# Altium PCB PCB_v5.PcbDoc (part 1 of 2)
Units mm, origin at the board's own origin, x right, y up, seen from the top; angles counter-clockwise.
Board outline 150 x 320 mm, 4 copper layers (Top Layer, Vcc, Gnd, Bottom Layer), stack 0.778 mm thick; 181 components, 87 nets, 559 pads, 205 vias.
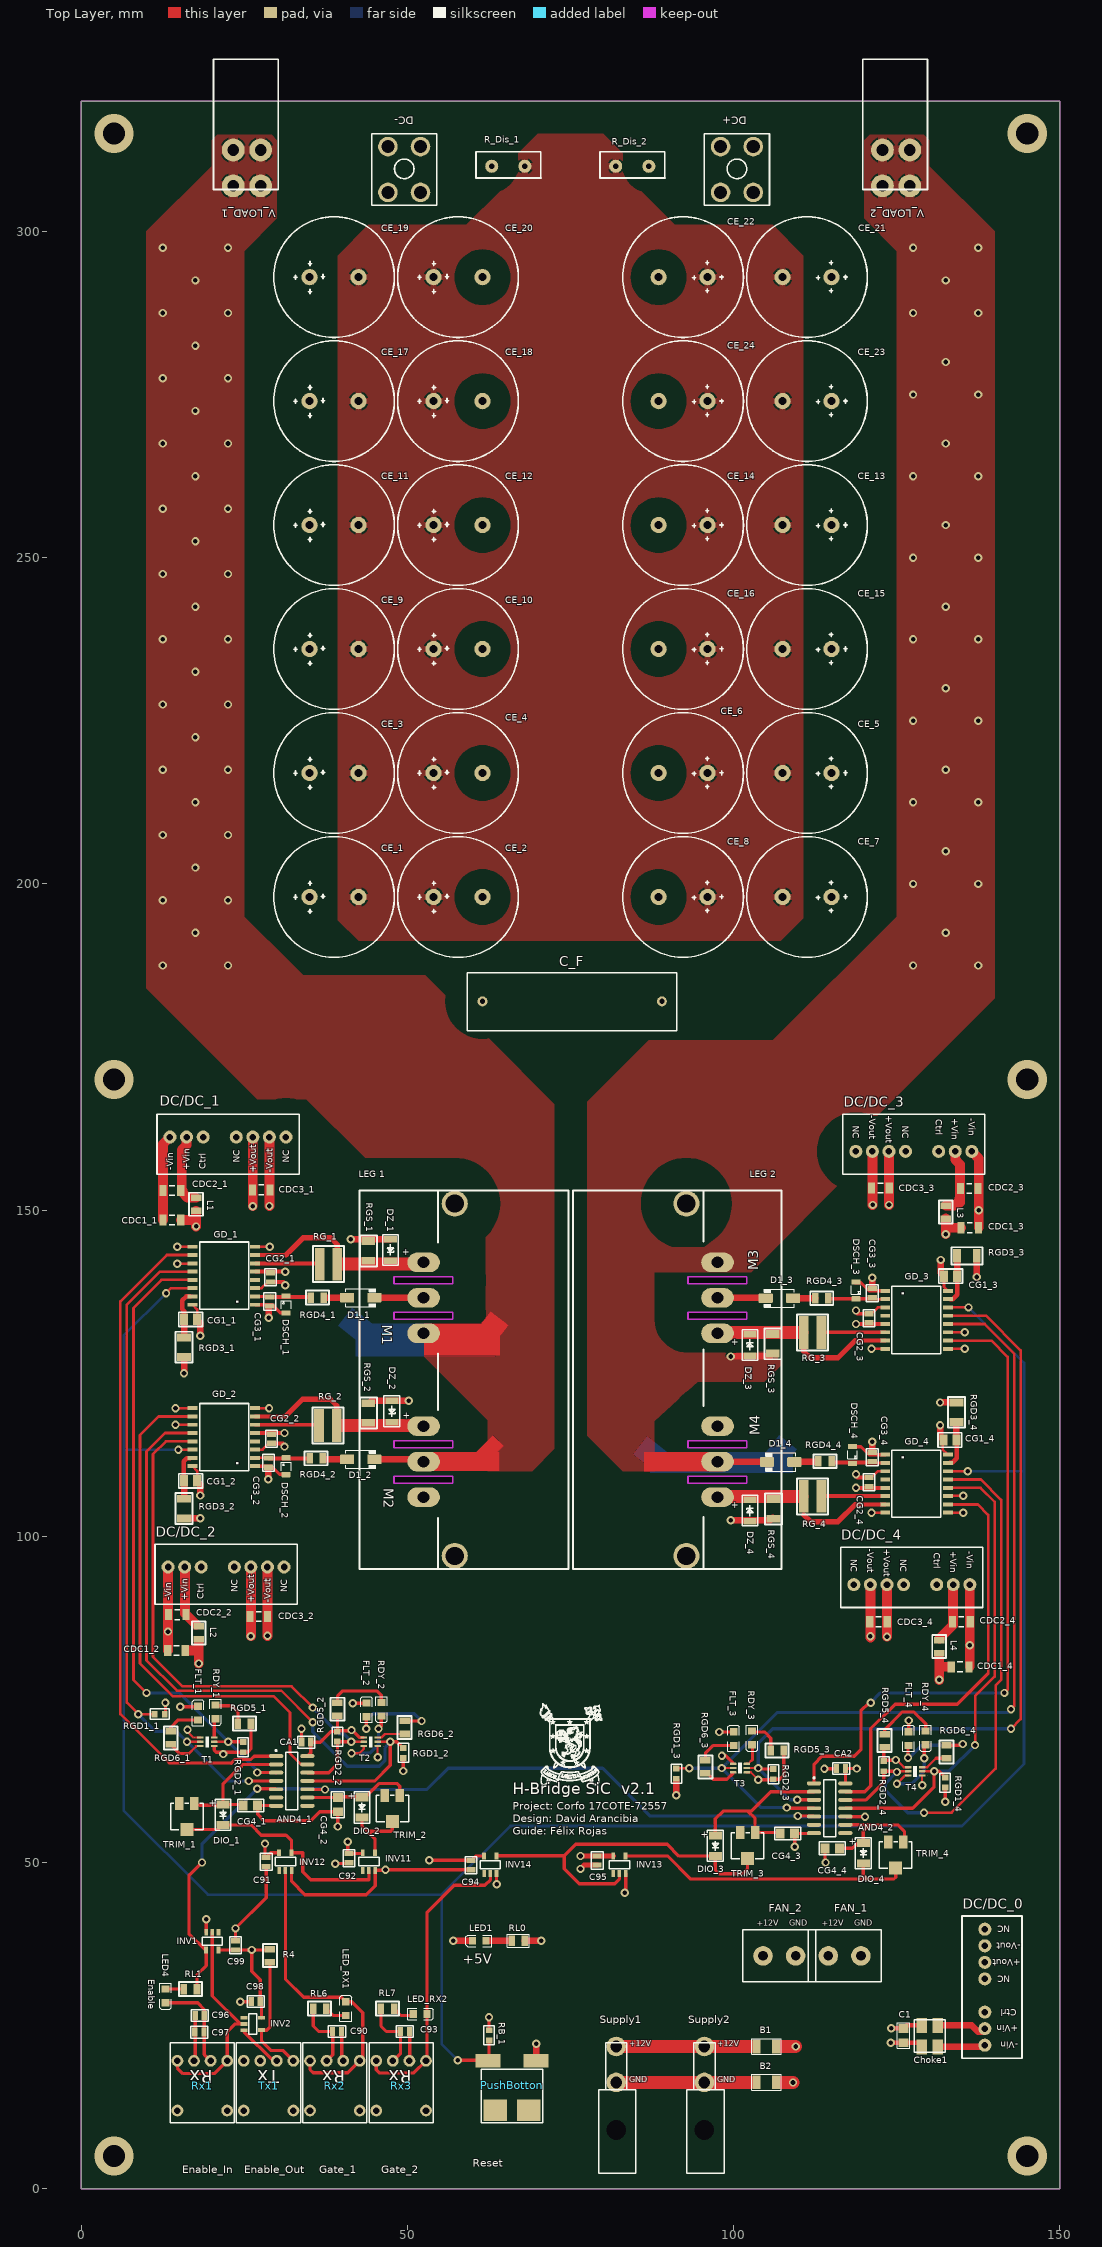
[diagram p0: Top Layer view]
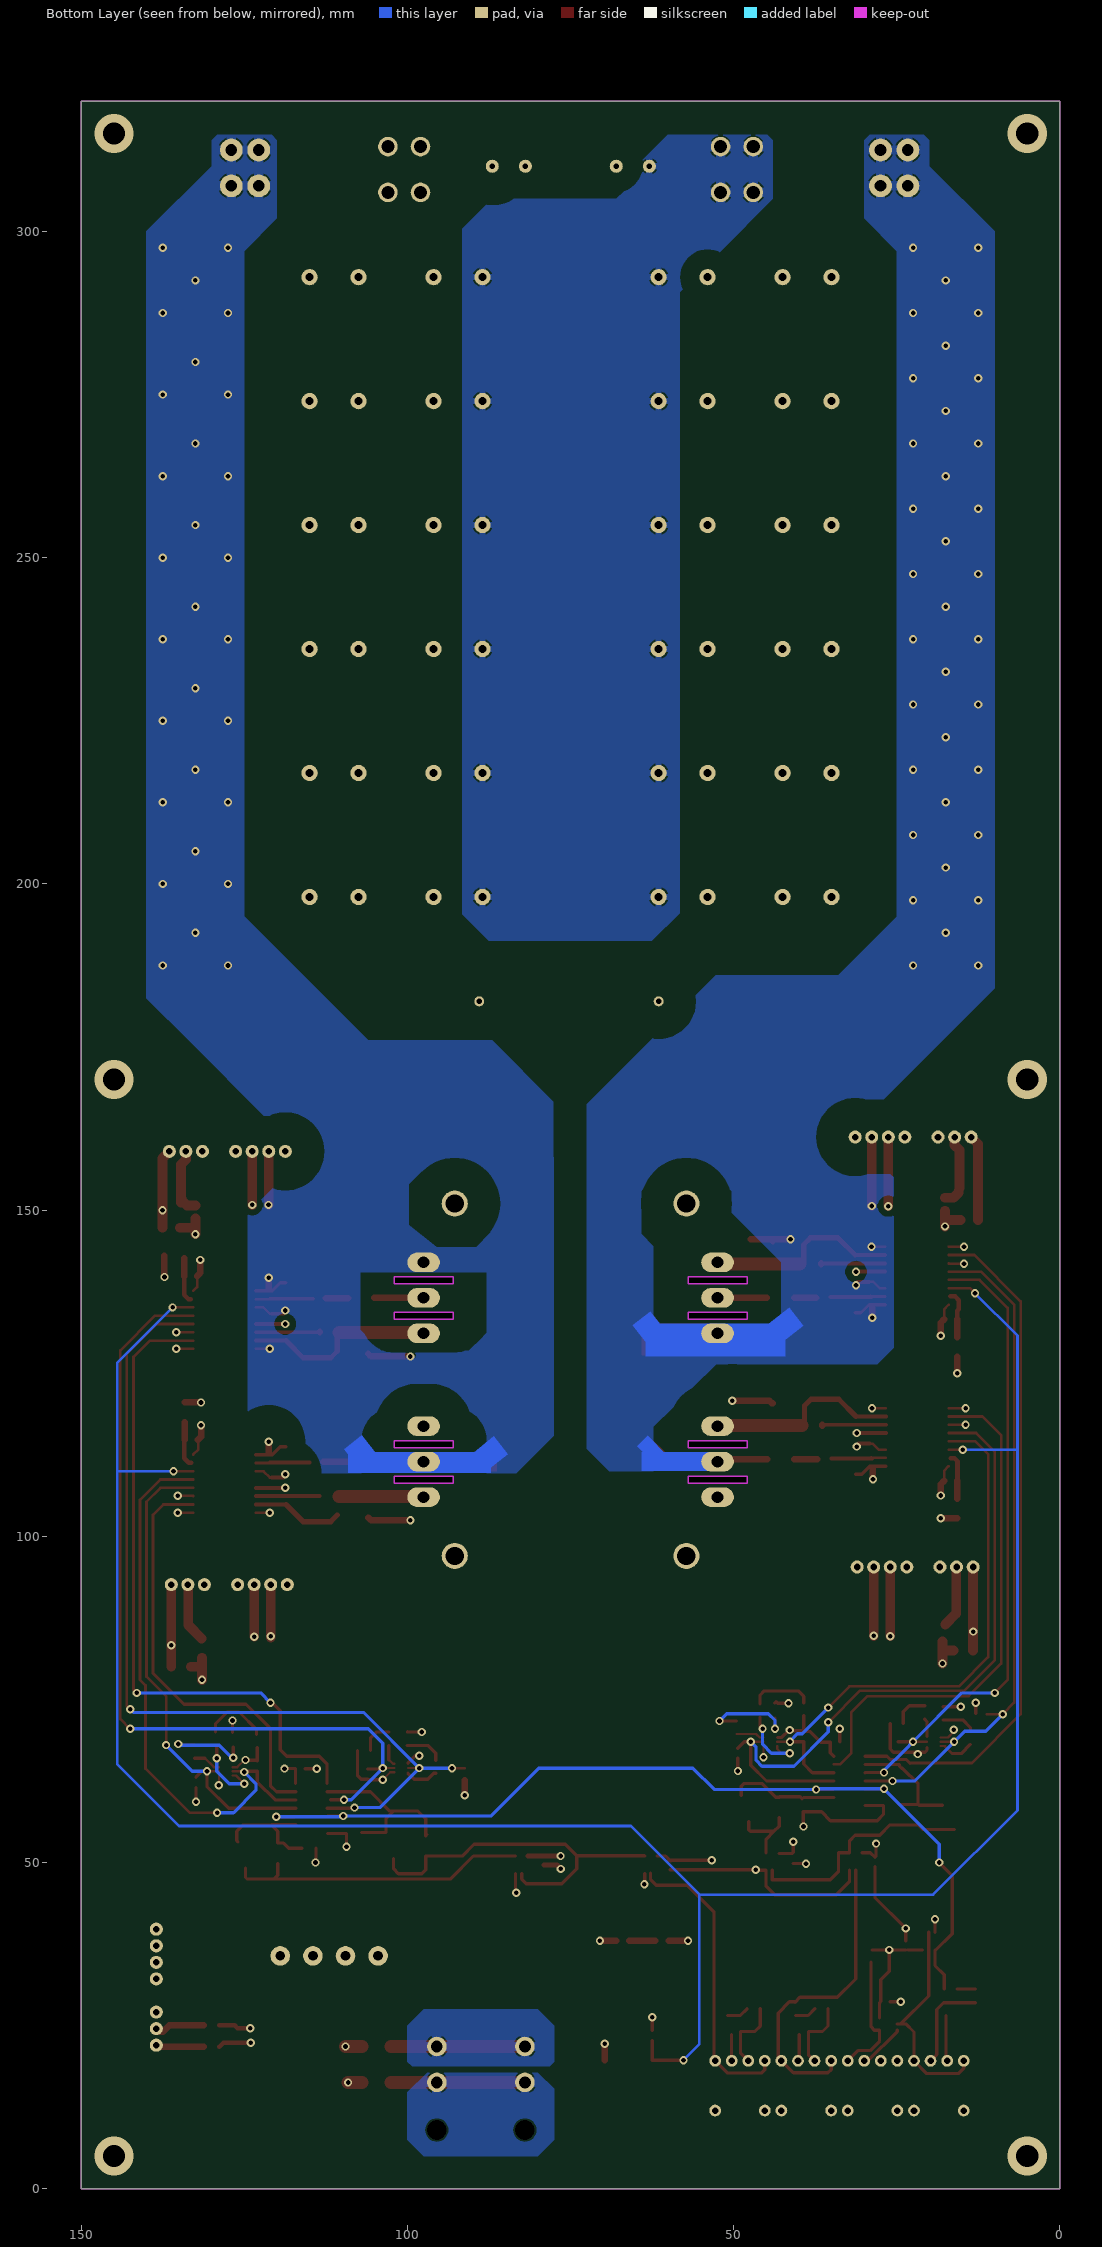
[diagram p1: Bottom Layer view, seen from below]
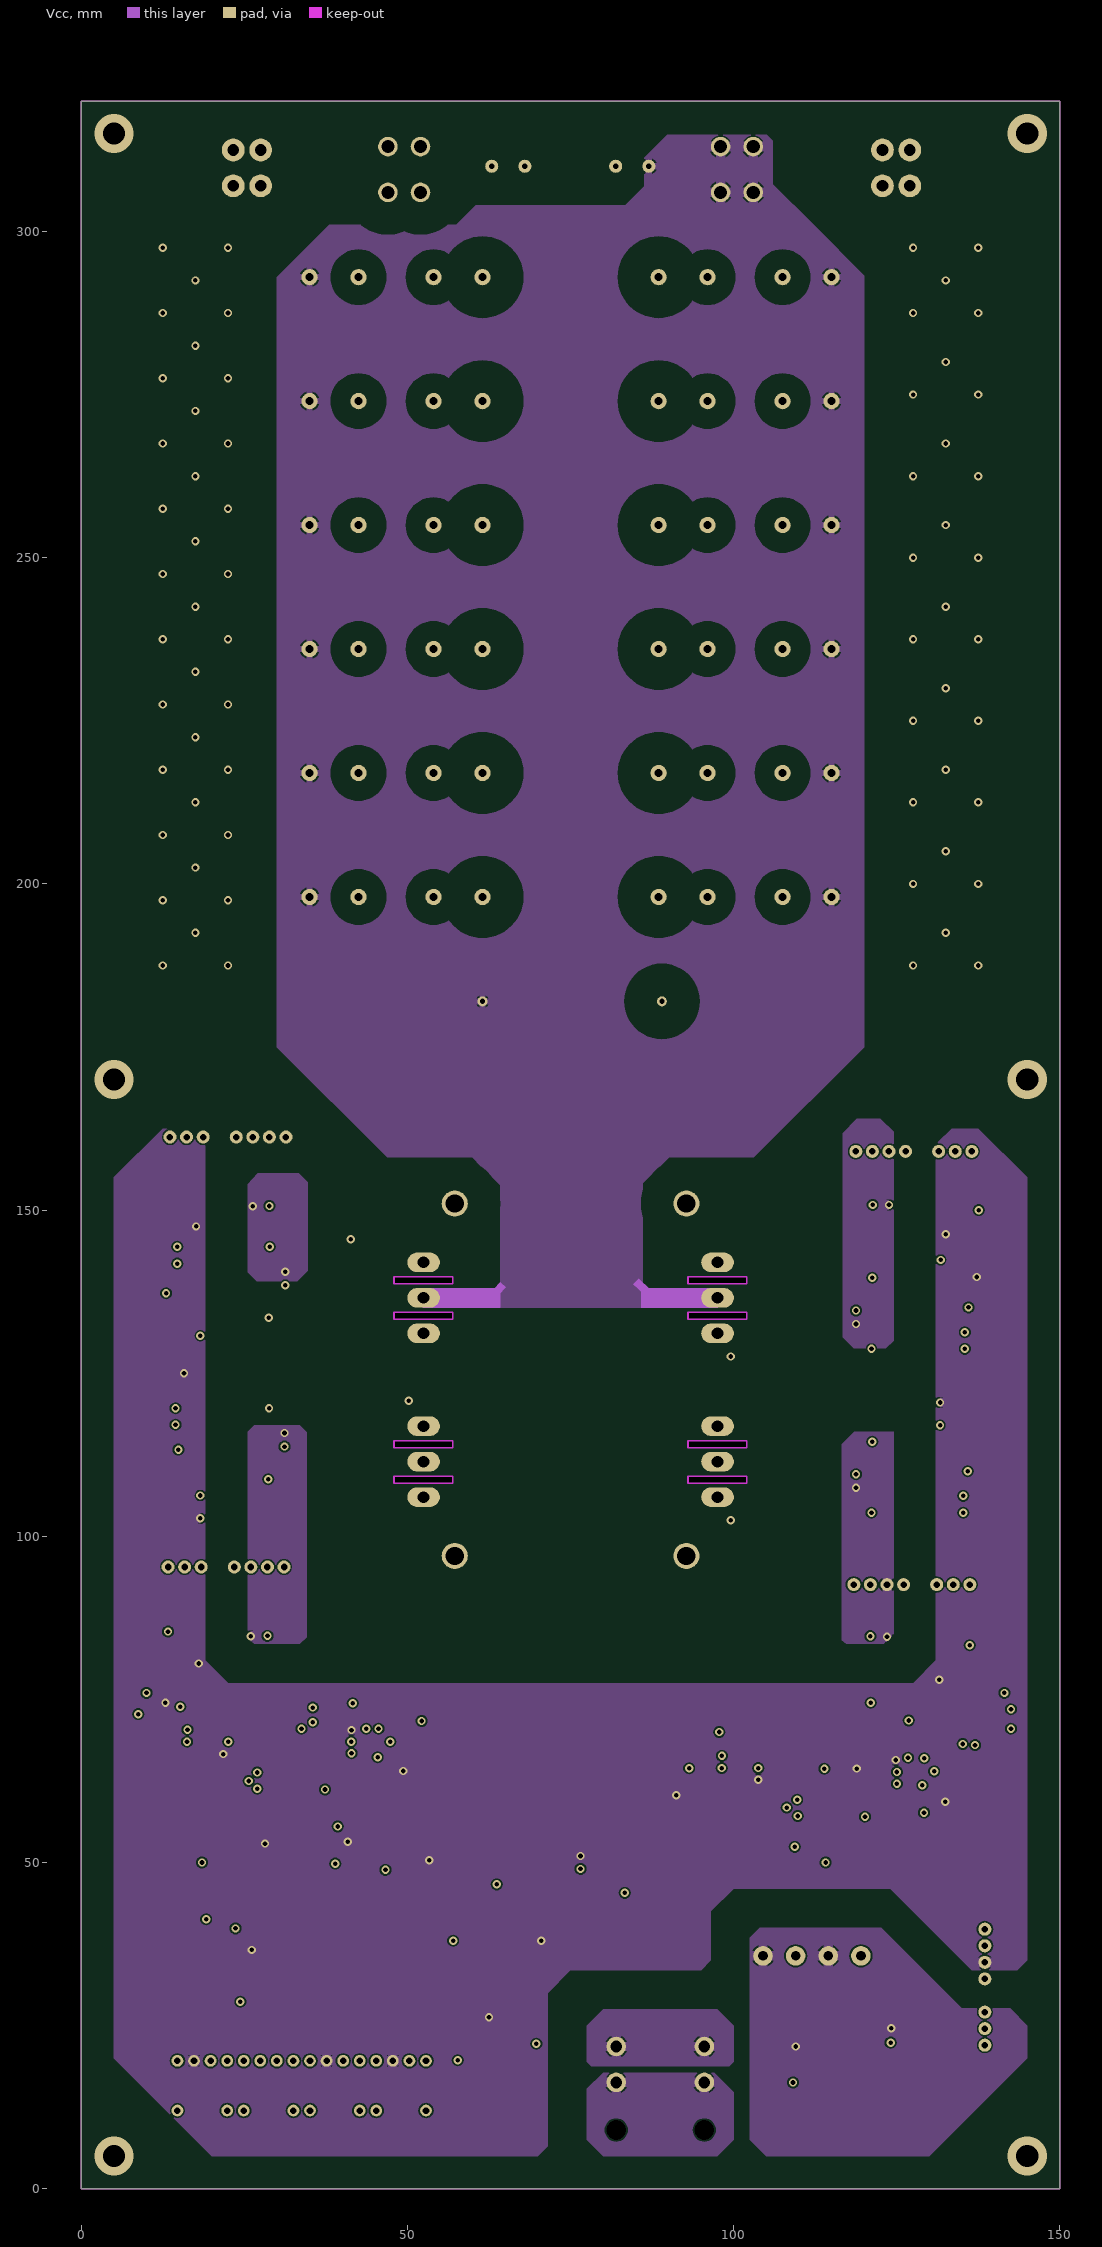
[diagram p2: Vcc]
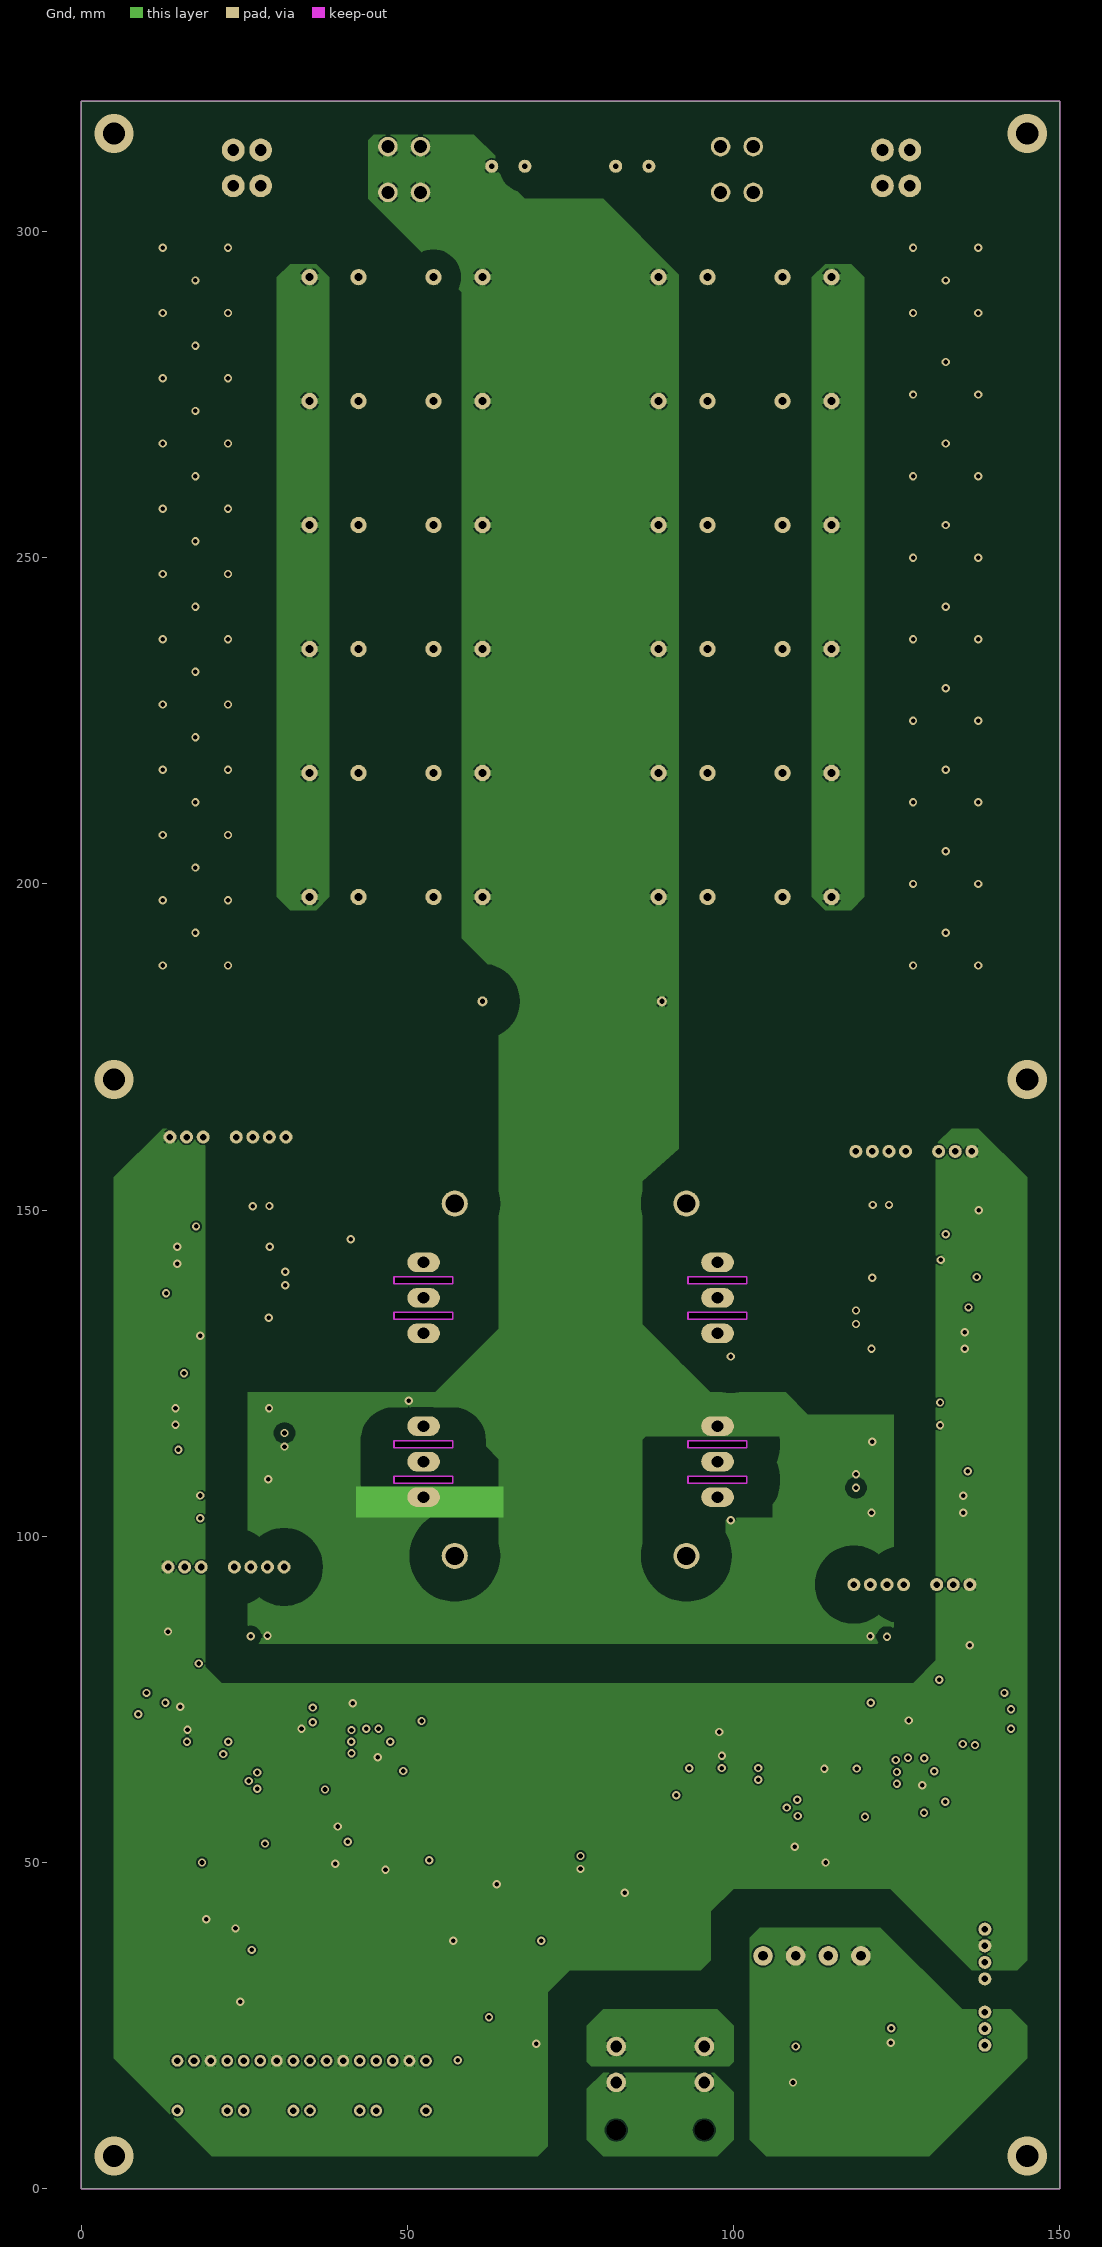
[diagram p3: Gnd]

## Layer stack, top to bottom
Top Solder: solder mask 0.0102, Solder Resist, Dk 3.5
Top Layer: signal copper 0.0356
Dielectric 1: core 0.254, FR-4, Dk 4.2
Vcc: signal copper 0.036
Dielectric 3: prepreg 0.127, Dk 4.2
Gnd: signal copper 0.036
Dielectric 2: core 0.254, FR-4, Dk 4.2
Bottom Layer: signal copper 0.0356
Bottom Solder: solder mask 0.0102, Solder Resist, Dk 3.5

## Board outline
0,0 150,0 150,320 0,320
cut-out: 47.95,138.7 56.95,138.7 56.95,139.8 47.95,139.8
cut-out: 47.95,133.26 56.95,133.26 56.95,134.36 47.95,134.36
cut-out: 47.95,113.58 56.95,113.58 56.95,114.68 47.95,114.68
cut-out: 47.95,108.14 56.95,108.14 56.95,109.24 47.95,109.24
cut-out: 93,108.14 102,108.14 102,109.24 93,109.24
cut-out: 93,113.58 102,113.58 102,114.68 93,114.68
cut-out: 93,133.26 102,133.26 102,134.36 93,134.36
cut-out: 93,138.7 102,138.7 102,139.8 93,139.8

## Design rules (kind name [scope] priority, off if disabled: settings)
Clearance Clearance_PWR_DC-_1mm [InNamedPolygon('PWR_DC-') vs InNet('+15V_G4') OR InNet('+15V_G2') OR Innet('CLAMP_2') OR Innet('CLAMP_4') OR Innet('NetCDC4_2_1') OR Innet('NetCDC4_4_1')] p1: gap=0.254 except(1: Arc-Poly Track-Poly SMDPad-Poly THPad-Poly Via-Poly Fill-Poly Poly-Poly)
Clearance Clearance_PWR_LOAD2_1mm [InNamedPolygon('PWR_LOAD2') vs InNet('+15V_G3') OR InNet('CLAMP_3')] p2: gap=0.254 except(1: Arc-Poly Track-Poly SMDPad-Poly THPad-Poly Via-Poly Fill-Poly Poly-Poly)
Clearance Clearance_PWR_LOAD1_1mm [InNamedPolygon('PWR_LOAD1') vs InNet('+15V_G1') OR InNet('CLAMP_1')] p3: gap=0.254 except(1: Arc-Poly Track-Poly SMDPad-Poly THPad-Poly Via-Poly Fill-Poly Poly-Poly)
Clearance Clearance_2 [InNamedPolygon('-15V')] p4: gap=0.254 except(2: Poly-Poly)
Clearance Clearance_1 [InNamedPolygon('+15V')] p5: gap=0.254
Clearance Clearance_PWR_DC+_PM [InNamedPolygon('PWR_DC+') vs InNet('DCLINK_PM')] p6: gap=0.254 except(3: Arc-Poly Track-Poly SMDPad-Poly THPad-Poly Via-Poly Fill-Poly Poly-Poly)
Clearance Clearance_PWR_DC-_PM [InNamedPolygon('PWR_DC-') vs InNet('DCLINK_PM')] p7: gap=0.254 except(3: Arc-Poly Track-Poly SMDPad-Poly THPad-Poly Via-Poly Fill-Poly Poly-Poly)
Clearance Clearance_PWR_DCLink_PM [InNamedPolygon('PWR_DCLink_PM')] p8: gap=0.254 except(3: Arc-Poly Track-Poly SMDPad-Poly THPad-Poly Via-Poly Fill-Poly Poly-Poly)
Clearance Clearance_PWR_DC+ [InNamedPolygon('PWR_DC+')] p9: gap=0.254 except(5: Arc-Poly Track-Poly SMDPad-Poly THPad-Poly Via-Poly Fill-Poly Poly-Poly)
Clearance Clearance_PWR_DC- [InNamedPolygon('PWR_DC-')] p10: gap=0.254 except(5: Arc-Poly Track-Poly SMDPad-Poly THPad-Poly Via-Poly Fill-Poly Poly-Poly)
Clearance Clearance_PWR_LOAD2 [InNamedPolygon('PWR_LOAD2')] p11: gap=0.254 except(5: Track-Poly SMDPad-Poly THPad-Poly Via-Poly Poly-Poly)
Clearance Clearance_PWR_LOAD1 [InNamedPolygon('PWR_LOAD1')] p12: gap=0.254 except(5: Track-Poly SMDPad-Poly THPad-Poly Via-Poly Poly-Poly)
Clearance Clearance_ADGND_G2 [InNamedPolygon('ADGND_G2')] p13: gap=0.254 except(5: Track-Poly SMDPad-Poly THPad-Poly Via-Poly Poly-Poly)
Clearance [All] p14: gap=0.254
ComponentClearance [All] p1: gap=0 collisioncheckmode=3 verticalgap=0 showdistances=FALSE
Height [All] p1: minheight=0 maxheight=100 prefheight=12.7
HoleSize [All] p1: absolutevalues=TRUE maxlimit=4 minlimit=0.025 maxpercent=80.000 minpercent=20.000
PolygonConnect Capacitor_Connect [(InNet('EDC+') AND HasFootprint('COND_ELECTRO'))] p1: connectstyle=Relief reliefconductorwidth=1 reliefentries=4 polygonreliefangle="90 Angle" airgapwidth=0.254
PolygonConnect Capacitor_Connect_3 [(InNet('ADGND_G1') OR InNet('ADGND_G3') OR InNet('EDC+') OR InNet('ADGND_G2')) AND (HasFootprint('MOSFET-TO247_LEG_1') OR HasFootprint('MOSFET-TO247_LEG_2'))] p2: connectstyle=Direct reliefconductorwidth=1 reliefentries=4 polygonreliefangle="90 Angle" airgapwidth=0.254
PolygonConnect Capacitor_Connect_1 [(InNet('DCLINK_PM') AND HasFootprint('COND_ELECTRO'))] p3: connectstyle=Relief reliefconductorwidth=1 reliefentries=4 polygonreliefangle="90 Angle" airgapwidth=0.254
PolygonConnect Capacitor_Connect_2 [(InNet('ADGND_G2') AND HasFootprint('COND_ELECTRO'))] p4: connectstyle=Relief reliefconductorwidth=1 reliefentries=4 polygonreliefangle="90 Angle" airgapwidth=0.254
PolygonConnect Res_Dis_Connect [((InNet('ADGND_G2') OR InNet('EDC+') OR InNet('DCLINK_PM')) AND HasFootprint('TO-220'))] p5: connectstyle=Relief reliefconductorwidth=1 reliefentries=4 polygonreliefangle="90 Angle" airgapwidth=0.254
PolygonConnect Cap_Snubber_Connect [((InNet('ADGND_G2') OR InNet('EDC+') OR InNet('DCLINK_PM')) AND HasFootprint('CF_NN'))] p6: connectstyle=Relief reliefconductorwidth=1 reliefentries=4 polygonreliefangle="90 Angle" airgapwidth=0.254
PolygonConnect PolygonConnect_PWR_Manual [InNamedPolygon('PWR_MANUAL')] p7: connectstyle=Relief reliefconductorwidth=0.2 reliefentries=4 polygonreliefangle="90 Angle" airgapwidth=0.254
PolygonConnect [All] p8: connectstyle=Relief reliefconductorwidth=1.5 reliefentries=4 polygonreliefangle="90 Angle" airgapwidth=0.254
RoutingVias [All] p1: holewidth=0.711 width=1.27 viastyle="Through Hole" minholewidth=0.711 minwidth=1.27 maxholewidth=0.711 maxwidth=1.27
SilkToSilkClearance [All] p1: silktosilkclearance=0
SilkToSolderMaskClearance [IsPad] p1: minsilkscreentomaskgap=0 clearancetoexposedcopper=TRUE
SolderMaskExpansion [All] p1: expansion=0.102
Width [All] p1: maxlimit=4 minlimit=0.254 preferedwidth=0.5
25 further rules are at their usual default settings.

## Classes and differential pairs
component class ENABLE_MOSFETS: DC+ DC- "LEG 1" "LEG 2" V_LOAD_1 V_LOAD_2
component class DC_LINK: C_F CE_1 CE_2 CE_3 CE_4 CE_5 CE_6 CE_7 CE_8 CE_9 CE_10 CE_11 CE_12 CE_13 CE_14 CE_15 CE_16 CE_17 CE_18 CE_19 CE_20 CE_21 CE_22 CE_23 CE_24 R_Dis_1 R_Dis_2
component class SUPPLY_IN: B1 B2 C1 Choke1 DC/DC_0 "Fan Supply" FAN_1 FAN_2 LED1 RL0 Supply1 Supply2 "SUPPLY 2"
component class ENABLE: C96 C97 C98 C99 INV1 INV2 LED4 R4 RL1 Rx1 Tx1
component class GDRIVE1: AND4_1 CA1 CDC1_1 CDC2_1 CDC3_1 CG1_1 CG2_1 CG3_1 CG4_1 D1_1 DC/DC_1 DIO_1 DSCH_1 DZ_1 FLT_1 GD_1 L1 PushBotton RB_1 RDY_1 RG_1 RGD1_1 RGD2_1 RGD3_1 RGD4_1 RGD5_1 RGD6_1 RGS_1 T1 TRIM_1
component class GDRIVE2: CDC1_2 CDC2_2 CDC3_2 CG1_2 CG2_2 CG3_2 CG4_2 D1_2 DC/DC_2 DIO_2 DSCH_2 DZ_2 FLT_2 GD_2 L2 RDY_2 RG_2 RGD1_2 RGD2_2 RGD3_2 RGD4_2 RGD5_2 RGD6_2 RGS_2 T2 TRIM_2
component class GDRIVE3: AND4_2 CA2 CDC1_3 CDC2_3 CDC3_3 CG1_3 CG2_3 CG3_3 CG4_3 D1_3 DC/DC_3 DIO_3 DSCH_3 DZ_3 FLT_3 GD_3 L3 RDY_3 RG_3 RGD1_3 RGD2_3 RGD3_3 RGD4_3 RGD5_3 RGD6_3 RGS_3 T3 TRIM_3
component class GDRIVE4: CDC1_4 CDC2_4 CDC3_4 CG1_4 CG2_4 CG3_4 CG4_4 D1_4 DC/DC_4 DIO_4 DSCH_4 DZ_4 FLT_4 GD_4 L4 RDY_4 RG_4 RGD1_4 RGD2_4 RGD3_4 RGD4_4 RGD5_4 RGD6_4 RGS_4 T4 TRIM_4
component class RX1: C90 C91 C92 C93 C94 C95 INV11 INV12 INV13 INV14 LED_RX1 LED_RX2 RL6 RL7 Rx2 Rx3

## Components (designator, comment, footprint, x,y, rotation, side; value= is the part's Value field where it differs from the comment)
AND4_1 "AND_4_2" SOIC-14 32.266,62.501 r0 top
AND4_2 "AND_4_2" SOIC-14 114.723,58.324 r0 top
B1 "Bead" RES_1206 103.5,21.8 r270 top
B2 "Bead" RES_1206 103.5,16.3 r270 top
C1 "4.7uF" CAP_0805 126.05,24.585 r0 top
C90 "0.1uF" CAP_0603 38.5,24.1 r90 top
C91 "0.1uF" CAP_0603 28.341,50.805 r0 top
C92 "0.1uF" CAP_0603 41.041,51.377 r0 top
C93 "0.1uF" CAP_0603 48.9,24.1 r90 top
C94 "0.1uF" CAP_0603 59.741,50.305 r0 top
C95 "0.1uF" CAP_0603 79.075,51.005 r0 top
C96 "4.7uF" CAP_0603 17.466,26.551 r90 top
C97 "0.1uF" CAP_0603 17.4,24 r90 top
C98 "0.1uF" CAP_0603 27.441,28.705 r270 top
C99 "0.1uF" CAP_0603 23.641,36.605 r180 top
C_F "Cap Semi" CF_NN 89,182 r180 top
CA1 "0.1uF" CAP_0603 35.19,68.452 r270 top
CA2 "0.1uF" CAP_0603 117.158,64.422 r270 top
CDC1_1 "10uF" C1206 13.9,148.5 r180 top
CDC1_2 "10uF" C1206 14.6,82.5 r180 top
CDC1_3 "10uF" C1206 136.2,147.3 r0 top
CDC1_4 "10uF" C1206 134.7,80 r0 top
CDC2_1 "10uF" C1206 13.9,153 r180 top
CDC2_2 "10uF" C1206 14.7,88 r180 top
CDC2_3 "10uF" C1206 136.1,153.3 r0 top
CDC2_4 "10uF" C1206 134.9,86.9 r0 top
CDC3_1 "4.7uF" C1206 27.6,153.1 r0 top
CDC3_2 "4.7uF" C1206 27.2,87.7 r0 top
CDC3_3 "4.7uF" C1206 122.5,153.4 r180 top
CDC3_4 "4.7uF" C1206 122.2,86.9 r180 top
CE_1 "100uF" COND_ELECTRO 35,198 r0 top
CE_2 "100uF" COND_ELECTRO 54,198 r0 top
CE_3 "100uF" COND_ELECTRO 35,217 r0 top
CE_4 "100uF" COND_ELECTRO 54,217 r0 top
CE_5 "100uF" COND_ELECTRO 115,217 r180 top
CE_6 "100uF" COND_ELECTRO 96,217 r180 top
CE_7 "100uF" COND_ELECTRO 115,198 r180 top
CE_8 "100uF" COND_ELECTRO 96,198 r180 top
CE_9 "100uF" COND_ELECTRO 35,236 r0 top
CE_10 "100uF" COND_ELECTRO 54,236 r0 top
CE_11 "100uF" COND_ELECTRO 35,255 r0 top
CE_12 "100uF" COND_ELECTRO 54,255 r0 top
CE_13 "100uF" COND_ELECTRO 115,255 r180 top
CE_14 "100uF" COND_ELECTRO 96,255 r180 top
CE_15 "100uF" COND_ELECTRO 115,236 r180 top
CE_16 "100uF" COND_ELECTRO 96,236 r180 top
CE_17 "100uF" COND_ELECTRO 35,274 r0 top
CE_18 "100uF" COND_ELECTRO 54,274 r0 top
CE_19 "100uF" COND_ELECTRO 35,293 r0 top
CE_20 "100uF" COND_ELECTRO 54,293 r0 top
CE_21 "100uF" COND_ELECTRO 115,293 r180 top
CE_22 "100uF" COND_ELECTRO 96,293 r180 top
CE_23 "100uF" COND_ELECTRO 115,274 r180 top
CE_24 "100uF" COND_ELECTRO 96,274 r180 top
CG1_1 "100nF" CAP_0805_L 17.75,133.25 r270 top
CG1_2 "100nF" CAP_0805_L 17.75,108.5 r270 top
CG1_3 "100nF" CAP_0805_L 132.246,139.87 r90 top
CG1_4 "100nF" CAP_0805_L 132.14,114.769 r90 top
CG2_1 "1uF" CAP_0603 29,139 r180 top
CG2_2 "1uF" CAP_0603 29.154,114.255 r180 top
CG2_3 "1uF" CAP_0603 120.75,134.12 r0 top
CG2_4 "1uF" CAP_0603 120.75,109 r0 top
CG3_1 "220pF" CAP_0603 28.9,135.3 r180 top
CG3_2 "220pF" CAP_0603 28.7,110.6 r180 top
CG3_3 "220pF" CAP_0603 121.25,137.97 r0 top
CG3_4 "220pF" CAP_0603 121.25,112.85 r0 top
CG4_1 "1nF" CAP_0805 24.834,58.731 r90 top
CG4_2 "1nF" CAP_0805 39.33,59.979 r0 top
CG4_3 "1nF" CAP_0805 107.146,54.453 r90 top
CG4_4 "1nF" CAP_0805 116.206,52.174 r270 top
Choke1 "Value" "Choque SMD" 130.05,23.385 r0 top
D1_1 "DIODE" DO-214AC 42.837,136.583 r0 top
D1_2 "DIODE" DO-214AC 42.837,111.8 r0 top
D1_3 "DIODE" DO-214AC 107,136.5 r180 top
D1_4 "DIODE" DO-214AC 107.2,111.4 r180 top
DC+ "TERMINAL_M4" M4_6PIN_SCREW 98,306 r0 top
DC- "TERMINAL_M4" M4_6PIN_SCREW 47,306 r0 top
DC/DC_0 "RS6-1205S" "DC/DC SIP-8" 138.5,22 r90 top
DC/DC_1 "DC/DC SIP-8 1Output" "DC/DC SIP-8" 13.6,161.2 r0 top
DC/DC_2 "DC/DC SIP-8 1Output" "DC/DC SIP-8" 13.3,95.3 r0 top
DC/DC_3 "DC/DC SIP-8 1Output" "DC/DC SIP-8" 136.5,159 r180 top
DC/DC_4 "DC/DC SIP-8 1Output" "DC/DC SIP-8" 136.2,92.6 r180 top
DIO_1 "DIOde" DIO_BAS85-GS08 21.73,55.763 r0 top
DIO_2 "DIOde" DIO_BAS85-GS08 43.03,56.879 r0 top
DIO_3 "DIOde" DIO_BAS85-GS08 97.183,50.994 r0 top
DIO_4 "DIOde" DIO_BAS85-GS08 119.88,49.861 r0 top
DSCH_1 "DIODE_SCHOTTKY" SOD323W 31.4,135.5 r90 top
DSCH_2 "DIODE_SCHOTTKY" SOD323W 31.4,110.7 r90 top
DSCH_3 "DIODE_SCHOTTKY" SOD323W 118.75,137.75 r270 top
DSCH_4 "DIODE_SCHOTTKY" SOD323W 118.228,112.5 r270 top
DZ_1 "15V" BZV55-C15,115 47.39,142.25 r0 top
DZ_2 "15V" BZV55-C15,115 47.6,117.5 r0 top
DZ_3 "15V" BZV55-C15,115 102.5,131 r180 top
DZ_4 "15V" BZV55-C15,115 102.5,105.6 r180 top
FAN_1 "JMP" "Terminal Block 2 pos 8A" 117,35.7 r180 top
FAN_2 "JMP" "Terminal Block 2 pos 8A" 107,35.7 r180 top
FLT_1 "RED" LED_0805 17.916,72.901 r90 top
FLT_2 "RED" LED_0805 43.7,73.4 r90 top
FLT_3 "RED" LED_0805 100,69 r90 top
FLT_4 "RED" LED_0805 126.8,69 r90 top
GD_1 "1ED020I12-F2_Infineon" SOIC_16W 17.25,135.495 r90 top
GD_2 "1ED020I12-F2_Infineon" SOIC_16W 17.25,110.75 r90 top
GD_3 "1ED020I12-F2_Infineon" SOIC_16W 132.64,137.625 r270 top
GD_4 "1ED020I12-F2_Infineon" SOIC_16W 132.64,112.519 r270 top
INV1 "NOT SCHMITT" INV_SN74AHC1G14DBVR 21.041,39.305 r180 top
INV2 "NOT OPEN COLLECTOR" INV_SN74LVC1G06DBVR 24.941,26.205 r270 top
INV11 "NOT SCHMITT" INV_SN74AHC1G14DBVR 43.141,48.805 r0 top
INV12 "NOT SCHMITT" INV_SN74AHC1G14DBVR 30.341,48.805 r0 top
INV13 "NOT SCHMITT" INV_SN74AHC1G14DBVR 81.541,48.305 r0 top
INV14 "NOT SCHMITT" INV_SN74AHC1G14DBVR 61.741,48.305 r0 top
L1 "2.2uH" RES_0805 17.6,149.9 r180 top
L2 "2.2uH" RES_0805 18,84.2 r180 top
L3 "2.2uH" RES_0805 132.5,148.7 r180 top
L4 "2.2uH" RES_0805 131.5,82.1 r180 top
LED1 "+5V" LED_0805 61,38 r180 top
LED4 "Enable" LED_0805 12.925,29.555 r270 top
LED_RX1 "GREEN" LED_0805 40.541,27.605 r90 top
LED_RX2 "GREEN" LED_0805 51.95,26.78 r0 top
"LEG 1" "MOSFET_SINK" MOSFET-TO247_LEG_1 57.25,151 r270 top locked
"LEG 2" "MOSFET_SINK" MOSFET-TO247_LEG_2 92.75,151 r90 top locked
PushBotton "SWITCH PUSH SPST-NO" "SWITCH PUSH SPST-NO" 66.03,19.625 r180 top
R4 "100_Ohm" RES_0805 28.92,36.731 r0 top
R_Dis_1 "100k" TO-220 68,310 r180 top
R_Dis_2 "100k" TO-220 87,310 r180 top
RB_1 "100k" 0603 62.5,23.5 r90 top
RDY_1 "Green" LED_0805 20.6,73.1 r270 top
RDY_2 "Green" LED_0805 46,73.5 r270 top
RDY_3 "Green" LED_0805 102.8,69.1 r270 top
RDY_4 "Green" LED_0805 129.4,69.1 r270 top
RG_1 "1218" RES_1218 39.25,141.732 r90 top
RG_2 "1218, la mas grande" RES_1218 39.154,116.987 r90 top
RG_3 "1218, la mas grande" RES_1218 110.75,131.25 r270 top
RG_4 "RON 1218" RES_1218 110.75,106.13 r270 top
RGD1_1 "10k" 0603 12,72.75 r0 top
RGD1_2 "10k" 0603 49.366,66.801 r270 top
RGD1_3 "10k" 0603 91.225,63.65 r270 top
RGD1_4 "10k" 0603 132.423,62.274 r270 top
RGD2_1 "10k" 0603 24.816,67.701 r270 top
RGD2_2 "10k" 0603 39.266,69.301 r90 top
RGD2_3 "10k" 0603 106.073,63.574 r270 top
RGD2_4 "10k" 0603 123.023,64.774 r90 top
RGD3_1 "10R" RES_1206 15.75,127.5 r0 top
RGD3_2 "10R" RES_1206 15.75,102.75 r0 top
RGD3_3 "10R" RES_1206 137.25,143 r90 top
RGD3_4 "10R" RES_1206 134.14,120.519 r180 top
RGD4_1 "1K" RES_0805 35.2,136.6 r90 top
RGD4_2 "1K" RES_0805 35,111.955 r90 top
RGD4_3 "1K" RES_0805 114.5,136.5 r270 top
RGD4_4 "1K" RES_0805 115,111.5 r270 top
RGD5_1 "220_Ohm" RES_0805 26.016,71.301 r270 top
RGD5_2 "220_Ohm" RES_0805 39.266,72.501 r180 top
RGD5_3 "220_Ohm" RES_0805 107.673,67.174 r270 top
RGD5_4 "220_Ohm" RES_0805 123.123,67.674 r180 top
RGD6_1 "220_Ohm" RES_0805 13.716,70.101 r0 top
RGD6_2 "220_Ohm" RES_0805 49.566,71.701 r0 top
RGD6_3 "220_Ohm" RES_0805 95.673,65.674 r0 top
RGD6_4 "220_Ohm" RES_0805 132.623,67.974 r0 top
RGS_1 "10k" RES_1206 44,142.25 r0 top
RGS_2 "10k" RES_1206 44,117.4 r0 top
RGS_3 "10k" RES_1206 106,131 r180 top
RGS_4 "10k" RES_1206 106.1,105.7 r180 top
RL0 "220_Ohm" res_0805 66,38 r90 top
RL1 "220_Ohm" RES_0805 17.741,30.605 r270 top
RL6 "220_Ohm" RES_0805 35.541,27.605 r90 top
RL7 "220_Ohm" RES_0805 45.941,27.605 r90 top
Rx1 "RX FIBRA" RX_HFBR-2521Z 14.741,19.605 r180 top
Rx2 "RX FIBRA" RX_HFBR-2521Z 35.061,19.605 r180 top
Rx3 "RX FIBRA" RX_HFBR-2521Z 45.221,19.605 r180 top
Supply1 "649006227222_1X2" "CONECTOR TIPO ATX WURTH 2 POSICIONES ANGULO RECTO" 82,15.4 r0 top
Supply2 "649006227222_1X2" "CONECTOR TIPO ATX WURTH 2 POSICIONES ANGULO RECTO" 95.5,15.4 r0 top
T1 "TRANS PREBIAS" SOT363_ 19.316,68.501 r0 top
T2 "TRANS PREBIAS" SOT363_ 44.366,68.501 r180 top
T3 "TRANS PREBIAS" SOT363_ 100.973,64.474 r0 top
T4 "TRANS PREBIAS" SOT363_ 127.823,63.974 r180 top
TRIM_1 "TRIM" TRIM_TS53YJ203MR10 17.33,59.063 r180 top
TRIM_2 "TRIM" TRIM_TS53YJ203MR10 48.83,60.279 r180 top
TRIM_3 "TRIM" TRIM_TS53YJ203MR10 103.283,54.594 r180 top
TRIM_4 "TRIM" TRIM_TS53YJ203MR10 125.98,53.161 r180 top
Tx1 "TX FIBRA" TX_HFBR-1521Z 32.521,19.605 r180 top
V_LOAD_1 "CONN HEADER 4POS" "CONN HEADER 4POS" 27.5,307 r180 top
V_LOAD_2 "CONN HEADER 4POS" "CONN HEADER 4POS" 127,307 r180 top

## Footprints (in the part's own frame and the unit in brackets; to place one, negate y for a bottom-side part, rotate by r counter-clockwise, add the part's x,y. Pads: shape width x height; smd on the part's side, far side on the other; paste and mask are expansions set on the pad)
0603 [mm]
  rect 0.9x1 smd: 1(0.801,0) 2(-0.775,0)
  silkscreen extent -1.45,-0.8 1.47,0.8, body extent -0.85,-0.45 0.85,0.45, height 0.55
BZV55-C15,115 [mm] "DIODE ZENER 15V 500MW LLDS"
  rect 2x1 smd: 1(0,0) 2(0,3.3)
  silkscreen extent -1.2,-0.7 1.2,4.01, body extent -1.09,-0.59 1.09,3.9, height 1.6
C1206 [mm] "Chip Capacitor, Body 3.2x1.6mm, IPC High Density"
  rect 1.1x1.7 smd: 1(-1.35,0) 2(1.35,0)
  silkscreen extent -0.4,-0.75 0.4,0.75, body extent -1.7,-0.9 1.7,0.9, height 1.3
CAP_0603 [mm] "CAP CER 0603"
  rect 1.4x0.8 smd: 1(0,0) 2(0,-1.4)
  silkscreen extent -0.91,-2.01 0.91,0.61, body extent -0.7,-1.8 0.7,0.4, height 0.9
CAP_0805 [mm] "CAP CER 0805"
  rect 1.55x1.35 smd: 1(0,0) 2(0,-2.2)
  silkscreen extent -0.94,-3.04 0.94,0.84, body extent -0.62,-2.1 0.63,-0.1, height 0.3
CAP_0805_L [mm] "Condensador cerámico 0.1UF 16V 5% X7R 0805"
  rect 1.75x1.2 smd: 1(0,0) 2(0,-2)
  silkscreen extent -1.1,-2.83 1.1,0.82
CF_NN [mil]
  round 60 hole 31.5: 1(0,0) 2(1082.68,0)
  silkscreen extent -89,-174 1174,177, body extent -89,-174 1174,177, height 669
"Choque SMD" [mm] "SRF0504-102Y"
  rect 1.6x2.3 smd: 1(-1.2,1.65) 2(1.2,1.65) 3(1.2,-1.65) 4(-1.2,-1.65)
  silkscreen extent -2.4,-2.49 2.4,2.51
COND_ELECTRO [mm]
  round 2.5 hole 1.2: 1(0,0) 2(7.5,0)
  silkscreen extent -5.5,-9.25 13,9.25, body extent -5.25,-9 12.75,9, height 35
"CONECTOR TIPO ATX WURTH 2 POSICIONES ANGULO RECTO" [mm] "Vertical Pitch 5.5 mm (649002227222)"
  round 3 hole 1.8: 1(0,6.4) 2(0,0.9)
  round 2 hole 3 unplated: ""(0,-6.4)
  silkscreen extent -2.7,-13 3.02,6.97, body extent -2.7,-13 3,6.97, height 11.65
"CONN HEADER 4POS" [mm] "Angulo recto pitch 4.2mm (64900429522)"
  round 3.5 hole 1.8: 1(0,0) 2(4.2,0) 3(0,-5.5) 4(4.2,-5.5)
  silkscreen extent -2.7,-19.4 7.22,0.57, body extent -2.7,-19.4 7.22,0.57, height 11.7
"DC/DC SIP-8" [mm]
  round 2 hole 1: 1(0,0) 2(2.54,0) 3(5.08,0) 5(10.16,0) 6(12.7,0) 7(15.24,0) 8(17.78,0)
  silkscreen extent -2,-5.7 19.8,3.5, body extent -2,-5.7 19.8,3.5, height 11.1
DIO_BAS85-GS08 [mm] "DIODE SCHOTTKY 30V 0.2A SOD80"
  rect 2x1.25 smd: 1(0,0) 2(0,3.125)
  silkscreen extent -1.21,-0.83 1.21,3.96, body extent -1.1,-0.72 1.1,3.85, height 1.6
DO-214AC [mm] "JEDEC DO214 variation AC. SMA"
  round 0.508 on Mech15: 0(0,0)
  rrect25% 2.2x1.5 smd: A(-2.1,0) K(2.1,0)
  silkscreen extent -2.3,-1.4 2.3,1.4, body extent -2.6,-1.3 2.6,1.3, height 2.42
INV_SN74AHC1G14DBVR [mm] "IC SCHMITT-TRG INV GATE SOT23-5"
  rect 0.55x1.05 smd mask+0.07: 1(0,0) 2(0.95,0) 3(1.9,0)
  rect 0.6x1.05 smd mask+0.1: 4(1.9,2.7) 5(0,2.7)
  silkscreen extent -0.6,0.72 2.5,1.98, body extent -0.7,0.62 2.6,2.08, height 1.45
INV_SN74LVC1G06DBVR [mm] "IC INVERTER SGL 1INPUT SOT23-5"
  rect 0.55x1.05 smd mask+0.07: 1(0,0) 2(0.95,0) 3(1.9,0)
  rect 0.6x1.05 smd mask+0.1: 4(1.9,2.7) 5(0,2.7)
  silkscreen extent -0.6,0.72 2.5,1.98, body extent -0.7,0.62 2.6,2.08, height 1.45
LED_0805 [mm] "Chip LED, 2-Leads, Body 2.0x1.3mm, IPC Medium Density"
  rect 1.1x1.2 smd: 1(-1.05,0) 2(1.05,0)
  silkscreen extent -1.91,-0.89 2.03,0.89, body extent -1,-0.63 1,0.62, height 0.68
M4_6PIN_SCREW [mm]
  round 3 hole 2: 1(0,7) 1(5,7) 2(0,0) 2(5,0)
  silkscreen extent -2.5,-2 7.5,9
MOSFET-TO247_LEG_1 [mm] "STW75NF30 - C247-075-3AE"
  oval 3x5 hole 1.8: D1(14.44,-4.775) G1(9,-4.775) G2(34.12,-4.775) S1D2(19.88,-4.775) S1D2(39.56,-4.775) S2(45,-4.775)
  round 4 hole 2.8: ""(0,0) ""(54,0)
  silkscreen extent -2,-14.6 56,17.4, body extent -2,-14.6 56,17.4, height 46.3
MOSFET-TO247_LEG_2 [mm] "STW75NF30 - C247-075-3AE"
  oval 3x5 hole 1.8: D3(-14.44,-4.775) G3(-19.88,-4.775) G4(-45,-4.775) S3D4(-39.56,-4.775) S3D4(-9,-4.775) S4(-34.12,-4.775)
  round 4 hole 2.8: ""(-54,0) ""(0,0)
  silkscreen extent -56,-14.6 2,17.4, body extent -56,-14.6 2,17.4, height 46.3
RES_0805 [mm] "RES 0805"
  rect 1.6x1 smd: 1(0,0) 2(0,-2)
  silkscreen extent -1.06,-2.76 1.06,0.76, body extent -0.9,-2.6 0.9,0.6, height 0.7
res_0805 [mm] "RES 0805"
  rect 1.6x1 smd: 1(0,0) 2(0,-2)
  silkscreen extent -0.97,-2.66 0.97,0.67, body extent -0.61,-2 0.64,0, height 0.5
RES_1206 [mm] "RES 1206"
  rect 2.1x1.2 smd: 1(0,0) 2(0,3)
  silkscreen extent -1.22,-0.76 1.22,3.76, body extent -0.78,-0.1 0.82,3.1, height 0.6
RES_1218 [mm] "RES 1218 WIDE"
  rect 5x1.5 smd: 1(0,0) 2(0,2.7)
  silkscreen extent -2.76,-1.01 2.76,3.71, body extent -2.6,-0.85 2.6,3.55, height 0.6
RX_HFBR-2521Z [mm] "RECEIVER FIBER OPTIC 600NM 5MBD"
  round 1.8 hole 1: 1(-7.62,0) 2(-5.08,0) 3(-2.54,0) 4(0,0) 5(0,7.62) 8(-7.62,7.62)
  silkscreen extent -8.72,-2.77 1.08,9.47, body extent -10.9,-2.8 1.3,16, height 7.62
SOD323W [mm] "SOD-323; 2 Leads; Body 1.8 x 1.35 mm, (LxW)"
  round 0.508 on Mech15: 0(0,0)
  rrect25% 0.8x1.4 smd: A(-1.25,0) K(1.35,0)
  silkscreen extent -0.64,-0.75 0.63,0.75, body extent -1.3,-0.67 1.3,0.68, height 1.1
SOIC-14 [mm] "SOIC, 14-Leads, Body 8.7x3.9mm, Pitch 1.27mm, IPC Medium Density"
  oval 2.2x0.6 smd: 1(-2.4,3.81) 2(-2.4,2.54) 3(-2.4,1.27) 4(-2.4,0) 5(-2.4,-1.27) 6(-2.4,-2.54) 7(-2.4,-3.81) 8(2.4,-3.81) 9(2.4,-2.54) 10(2.4,-1.27) 11(2.4,0) 12(2.4,1.27) 13(2.4,2.54) 14(2.4,3.81)
  silkscreen extent -2.52,-4.4 0.9,4.78, body extent -2,-4.38 2,4.38, height 1.75
SOIC_16W [mm]
  rect 0.6x1.5 smd: 1(0,-9.395) 2(1.27,-9.395) 3(2.54,-9.395) 4(3.81,-9.395) 5(5.08,-9.395) 6(6.35,-9.395) 7(7.62,-9.395) 8(8.89,-9.395) 9(8.89,0.2) 10(7.62,0.2) 11(6.35,0.2) 12(5.08,0.2) 13(3.81,0.2) 14(2.54,0.2) 15(1.27,0.2) 16(0,0.2)
  silkscreen extent -0.69,-8.41 9.62,-0.89, body extent -0.7,-9.75 9.6,0.55, height 2.3
SOT363_ [mm] "Small outline 2.1mm L x 1.25mm W x 1mm H"
  round 0.5 on Mech15: 0(0,0)
  rrect50% 1x0.35 smd: 1(-1.05,0.65) 2(-1.05,0) 3(-1.05,-0.65) 4(1.05,-0.65) 5(1.05,0) 6(1.05,0.65)
  silkscreen extent -0.3,-0.85 0.3,0.85, body extent -1.2,-1.1 1.2,1.1, height 1.1
"SWITCH PUSH SPST-NO" [mm]
  rect 3.81x2.03 smd: 1(-3.685,0) 3(3.685,0)
  rect 3.63x3.25 smd: ""(-2.58,7.585) ""(2.58,7.585)
  silkscreen extent -4.7,1.3 4.7,9.5, body extent -4.98,-0.56 5,18.89, height 6.25
"Terminal Block 2 pos 8A" [mm] "Wurth Electronics Inc. Pitch=5mm"
  round 3 hole 1.5: 1(-2.5,0) 2(2.5,0)
  silkscreen extent -5.6,-4 5.6,4, body extent -5.6,-4 5.6,4, height 11.35
TO-220 [mm]
  round 2 hole 0.86: 1(0,0) 2(5.08,0)
  silkscreen extent -2.48,-2.22 7.49,1.8
TRIM_TS53YJ203MR10 [mm] "TRIMMER 20K OHM 0.25W SMD"
  rect 1.3x2 smd: a(2.3,0) c(0,0)
  rect 2x2 smd: b(1.15,4)
  silkscreen extent -1.35,0 3.65,4, body extent -1.45,-0.1 3.75,4.1, height 2.7
TX_HFBR-1521Z [mm] "XMITTER FIBER OPTIC 600NM 5MBD"
  round 1.8 hole 1: 1(0,0) 2(2.54,0) 3(5.08,0) 4(7.62,0) 5(7.62,7.62) 8(0,7.62)
  silkscreen extent -1.12,-2.77 8.74,9.47, body extent -3.3,-2.8 8.9,16, height 7.62

## Part data
AND4_1 AND4_2: "IC GATE AND 2CH 4-INP 14-SO"
B1 B2: "FERRITE BEAD 60 OHM 1206 1LN"
C1: library part Cap_0805, "Capacitor"
C90 C91 C92 C93 C94 C95 C97 C98 C99 CA1 CA2: library part CAP_0603YC104KAT2A, "0.1µF ±10% 16V Ceramic Capacitor X7R 0603 (1608 Metric)"
C96: library part CAP_0603YC104KAT2A, "4.7µF ±20% 6.3V Ceramic Capacitor X5R 0603 (1608 Metric)"
C_F: "CAP FILM 0.22UF 10% 1KVDC RADIAL"
CDC1_1 CDC1_2 CDC1_3 CDC1_4 CDC2_1 CDC2_2 CDC2_3 CDC2_4: library part CAP_C0805C105Z3VACTU, "CAP CER 10UF 35V X6S 1206"
CDC3_1 CDC3_2 CDC3_3 CDC3_4: library part CAP_C0805C105Z3VACTU, "CAP CER 4.7UF 35V X7R 1206"
CE_1 CE_2 CE_3 CE_4 CE_5 CE_6 CE_7 CE_8 CE_9 CE_10 CE_11 CE_12 CE_13 CE_14 CE_15 CE_16 CE_17 CE_18 CE_19 CE_20 CE_21 CE_22 CE_23 CE_24: library part "Condensador DC-Link"
CG1_1 CG1_2 CG1_3 CG1_4: library part CAP_0603YC104KAT2A, "CAP CER 0.1UF 50V X7R 0805"
CG2_1 CG2_2 CG2_3 CG2_4: library part CAP_0603YC104KAT2A, "CAP CER 1UF 50V X5R 0603"
CG3_1 CG3_2 CG3_3 CG3_4: library part CAP_0603YC104KAT2A, "CAP CER 220PF 50V C0G/NP0 0603"
CG4_1 CG4_2 CG4_3 CG4_4: library part CAP_C0805C102J5GACTU, "CAP CER 1000PF 50V C0G/NP0 0805"
Choke1: library part "Choque bourns SMD", "1.5A"
D1_1 D1_2 D1_3 D1_4: "DIODE GEN PURP 1KV 1A SMA"
DC+ DC-: library part CON_FASTON, "CONN HEADER 4POS VERT W/O PEGS / CONN RECEPT 4POS FREE HANGING / CONN SOCKET 16AWG BRASS TIN (Agregar 4 al Part Number)"
DC/DC_0: library part "DC/DC SIP-8 1Output", "DC DC CONVERTER 5V 6W"
DIO_1 DIO_2 DIO_3 DIO_4: library part DIO_BAS85-GS08, "DIODE SCHOTTKY 30V 200MA SOD80"
DSCH_1: "DIODE SCHOTTKY 30V 200MA SOT23-3"
DSCH_2 DSCH_3 DSCH_4: "DIODE SCHOTTKY 40V 750MA SOD323"
DZ_1 DZ_2 DZ_3 DZ_4: library part DIO_BZV55-C15,115, "DIODE ZENER 15V 500MW SOD80C"
FAN_1 FAN_2: library part jumper2pos, "TERM BLOCK 2POS SIDE ENT 2.54MM / FAN AXIAL 40X15MM 12VDC WIRE"
FLT_1 FLT_2 FLT_3 RDY_1 RDY_2 RDY_3: library part "WL-SMCW 0805  150080GS75000", "LED RED CLEAR 0805 SMD"
FLT_4 RDY_4: library part "WL-SMCW 0805  150080GS75000", "Red 2V 0805"
GD_1 GD_2 GD_3 GD_4: "IC IGBT DVR 1200V 2A DSO16"
INV1 INV11 INV12 INV13 INV14: library part INV_SN74AHC1G14DBVR, "IC SCHMITT-TRG INV GATE SOT23-5"
INV2: library part INV_SN74LVC1G06DBVR, "IC INVERTER SGL 1INPUT SOT23-5"
L1 L2 L3 L4: library part Inductor, "FIXED IND 2.2UH 600MA 160 MOHM"
LED1: library part "WL-SMCW 0805  150080GS75000", "LED YELLOW CLEAR 0805 SMD"
LED4: library part "WL-SMCW 0805  150080RS75000", "Blue 3.2V 0805 SMD"
LED_RX1 LED_RX2: library part "WL-SMCW 0805  150080GS75000", "LED GREEN DIFFUSED 0805 SMD"
"LEG 1": library part MOSFET_2_SINK_LEG_1, "HEATSINK FOR TO-247 TO-264 / CAMMING CLIP FOR TO-247"
"LEG 2": library part MOSFET_2_SINK_LEG_2, "HEATSINK FOR TO-247 TO-264 / CAMMING CLIP FOR TO-247"
PushBotton: "SWITCH PUSH SPST-NO 0.4VA 20V"
R4: library part RES100_RPC0805JT100R, "RES 100 OHM 5% 1/4W 0805"
R_Dis_1 R_Dis_2: library part Res3, "RES 100K OHM 25W 1% TO220"
RB_1: library part RES_RCL121847R0JNEK, "RES SMD 100K OHM 1% 1/4W 0603"
RG_1 RG_2 RG_3: library part RES_RCL121847R0JNEK, "RON 1218"
RG_4: library part RES_RCL121847R0JNEK
RGD1_1 RGD1_2 RGD1_3 RGD1_4 RGD2_1 RGD2_2 RGD2_3 RGD2_4: library part RES_RCL121847R0JNEK, "RES SMD 10K OHM 0.1% 3/8W 0603"
RGD3_1 RGD3_2 RGD3_3 RGD3_4: library part RES_RCL121847R0JNEK, "RES SMD 10 OHM 1W 1206 WIDE"
RGD4_1 RGD4_2 RGD4_3 RGD4_4: library part RES_RCL121847R0JNEK, "RES SMD 1K OHM 0.1% 1W 0805"
RGD5_1 RGD5_2 RGD5_3 RGD5_4 RGD6_1 RGD6_2 RGD6_3 RGD6_4 RL0 RL1 RL6 RL7: library part RES_ERJ-3GEYJ471V, "1% 1/4W 0805"
RGS_1 RGS_2 RGS_3 RGS_4: library part RES_ERJ-8ENF2002V, "RES SMD 10K OHM 0-1% 1W 1206"
Rx1 Rx2 Rx3: library part Rx_HFBR-2521Z, "RECEIVER FIBER OPTIC 600NM 5MBD"
T1 T2 T3 T4: "TRANS PREBIAS NPN/PNP SOT666"
TRIM_1 TRIM_2 TRIM_3 TRIM_4: library part TRIM_TS53YJ203MR10, "TRIMMER 1K OHM 0.25W SMD"
Tx1: library part Tx_HFBR-1521Z, "XMITTER FIBER OPTIC 600NM 5MBD"
V_LOAD_1 V_LOAD_2: "CONN HEADER 4POS VERT W/O PEGS /  CONN RECEPT 4POS FREE HANGING"

## Via types
v1: diameter 1.27, hole 0.711, Top Layer to Bottom Layer, 196 vias
v2: diameter 6, hole 3.4, Top Layer to Bottom Layer, 6 vias
v3: diameter 1.3, hole 0.7, Top Layer to Bottom Layer, 2 vias
v4: diameter 1.27, hole 0.711, Top Layer to Bottom Layer, tented top, 1 vias

## Nets (pads, with @x,y where several pads share a name; then routed paths per layer and width w, separated by ;. In a path a pad name is that pad's centre, name@x,y a point inside that pad or via, vN(x,y) a via of type N, cw(c..) or ccw(c..) an arc to the next point about the centre after c; other vN are vias at no path point)
+5VCC: AND4_1.14 AND4_2.14 C90.1 C91.1 C92.1 C93.1 C94.1 C95.1 C96.1 C97.1 C98.1 C99.1 CA1.1 CA2.1 CDC1_1.1 CDC1_2.1 CDC1_3.1 CDC1_4.1 DC/DC_0.6 INV1.5 INV2.5 INV11.5 INV12.5 INV13.5 INV14.5 L1.1 L2.1 L3.1 L4.1 R4.1 RB_1.1 RGD1_1.1 RGD1_2.1 RGD1_3.1 RGD1_4.1 RGD2_1.1 RGD2_2.1 RGD2_3.1 RGD2_4.1 RGD3_1.1 RGD3_2.1 RGD3_3.1 RGD3_4.1 RGD5_1.1 RGD5_2.1 RGD5_3.1 RGD5_4.1 RL0.2 RL6.1 RL7.1 Rx1.3 Rx2.3 Rx3.3 T1.4 T2.4 T3.4 T4.4 | length 155.9
  Top Layer w0.35: T3.4@102.023,63.824 102.623,63.824 v1(103.773,62.674) ; v1@125.023,65.674 126.073,64.624 T4.4@126.773,64.624
  Top Layer w0.5: RGD1_1.1@12.899,72.835 v1(12.899,74.488) ; Rx1.3@17.466,19.79 C96.1@17.466,26.551 ; 20.366,67.641 20.366,67.243 20.709,66.9 RGD2_1.1@24.816,66.9 25.515,66.9 26.016,67.401 RGD5_1.1@26.016,71.301 ; INV1.5@21.041,36.605 C99.1@23.241,36.605 ; C99.1@23.641,36.605 v1(26.141,36.605) ; INV2.5@27.641,26.205 27.641,28.505 C98.1@27.441,28.705 27.441,32.045 26.141,33.345 v1(26.141,36.605) ; C91.1@28.171,50.975 v1(28.171,52.904) ; C91.1@28.341,50.805 29.041,51.505 INV12.5@30.341,51.505 ; R4.1@28.794,36.605 v1(26.141,36.605) ; AND4_1.14@34.666,66.311 35.19,66.835 CA1.1@35.19,68.452 36.655,68.452 38.305,70.102 RGD2_2.1@39.266,70.102 ; RL6.1@35.541,27.605 35.541,24.944 36.385,24.1 38.541,24.1 38.541,20.545 Rx2.3@37.601,19.605 ; RGD5_2.1@39.266,72.501 RGD2_2.1@39.266,70.102 ; C92.1@40.857,51.561 v1(40.857,53.205) ; C92.1@41.041,51.377 INV11.5@43.013,51.377 ; T2.4@43.241,69.18 42.658,69.18 42.62,69.18 41.599,70.201 39.365,70.201 RGD2_2.1@39.266,70.102 ; RL7.1@45.941,27.605 45.941,24.933 46.774,24.1 48.941,24.1 48.941,20.785 Rx3.3@47.761,19.605 ; v1@49.366,64.042 RGD1_2.1@49.366,66 ; v1(53.36,50.36) C94.1@59.98,50.36 ; C94.1@59.586,50.36 59.656,50.29 C94.1@59.706,50.34 ; C94.1@59.741,50.305 60.441,51.005 INV14.5@61.741,51.005 ; RB_1.1@62.5,24.301 v1(62.5,26.3) ; v1(103.773,62.674) RGD2_3.1@105.974,62.674 ; RGD2_3.1@106.073,62.773 107.072,62.773 107.673,63.374 RGD5_3.1@107.673,67.174 ; AND4_2.14@117.158,62.169 CA2.1@117.158,64.422 v1@118.832,64.422 ; RGD2_4.1@123.023,65.575 RGD5_4.1@123.023,67.574 ; RGD2_4.1@123.122,65.674 v1@125.023,65.674 ; v1@132.423,59.301 RGD1_4.1@132.423,61.473
  Top Layer w0.8: v1(76.53,51.005) INV13.5@81.541,51.005
  Top Layer w1: RGD3_2.1@15.75,102.75 v1(18.25,102.75) ; v1(15.75,125) RGD3_1.1@15.75,127.5 ; RL0.2@68,38 v1(70.5,38) ; v1@91.225,60.35 RGD1_3.1@91.225,62.6 ; v1(131.64,120.519) RGD3_4.1@134.14,120.519 ; v1(137.25,139.75) RGD3_3.1@137.25,143
  Top Layer w1.5: CDC1_1.1@15.25,148.5 17.4,148.5 ; CDC1_2.1@16.3,82.5 18,82.5 ; v1(17.6,147.5) L1.1@17.6,149.9 ; v1(18,80.5) 18,82.5 ; L2.1@18,83.9 18,82.5 ; v1(131.5,78) 131.5,80 ; 131.5,81.4 131.5,80 ; v1(132.5,146.3) L3.1@132.5,148.7 ; 132.7,147.3 CDC1_3.1@134.85,147.3 ; CDC1_4.1@133.2,80 131.5,80
  other v1: 132.42,59.298 91.2,60.325 49.349,64.025 118.852,64.402 124.825,65.725 21.775,66.625 41.425,70.3
+12V_EXT: B1.2 C1.1 Choke1.1 FAN_1.2 FAN_2.2 | length 7.4
  Top Layer w0.7: v3@124.169,24.585 C1.1@126.05,24.585 126.5,25.035 Choke1.1@128.85,25.035
  Top Layer w2: B1.2@107,21.8 v1(109.5,21.8)
  other v3: 124.128,24.626
+15V_G1: CDC3_1.1 CG2_1.2 DC/DC_1.6 GD_1.5 | length 15.1
  Top Layer w0.6: GD_1.5@26.761,140.575 v1(31.25,140.575)
  Top Layer w1.5: v1(26.3,150.6) DC/DC_1.6@26.3,161.2
+15V_G2: CDC3_2.1 CG2_2.2 DC/DC_2.6 GD_2.5 | length 15.1
  Top Layer w0.6: GD_2.5@26.665,115.83 v1(31.154,115.83)
  Top Layer w1.5: v1(26,84.7) DC/DC_2.6@26,95.3
+15V_G3: CDC3_3.1 CG2_3.2 DC/DC_3.6 GD_3.5 | length 12.7
  Top Layer w0.6: v1(118.75,132.545) GD_3.5@123.239,132.545
  Top Layer w1.5: v1(123.8,150.8) DC/DC_3.6@123.8,159
+15V_G4: CDC3_4.1 CG2_4.2 DC/DC_4.6 GD_4.5 | length 12.7
  Top Layer w0.6: v1(118.75,107.425) GD_4.5@123.239,107.425
  Top Layer w1.5: v1(123.5,84.6) DC/DC_4.6@123.5,92.8
/FLT_1: AND4_1.3 GD_1.13 RGD2_1.2 T1.5 | length 100.5
  Top Layer w0.35: T1.5@20.366,68.501 v1(22.516,68.501)
  Top Layer w0.4: v1(10,76) 8,78 8,135 12.305,139.305 GD_1.13@17.05,139.305
  Top Layer w0.5: v1(22.516,68.501) 24.791,68.501 RGD2_1.2@24.816,68.476 ; v1(26.966,63.801) 29.836,63.801 AND4_1.3@29.866,63.771
  Bottom Layer w0.5: v1(10,76) 10,75.754 10.246,76 15.017,76 v1(22.516,68.501) ; v1@22.527,68.501 23.655,67.373 23.655,67.37 26.966,64.059 v1(26.966,63.801)
/FLT_2: AND4_1.12 GD_2.13 RGD2_2.2 T2.5 | length 86.4
  Top Layer w0.35: v1(41.366,68.501) T2.5@43.316,68.501
  Top Layer w0.4: GD_2.13@17.05,114.56 12.96,114.56 11,112.6 11,81.5 15.5,77 32.25,77 v1(35.5,73.75)
  Top Layer w0.5: AND4_1.12@34.666,63.771 37.936,63.771 39.266,65.101 RGD2_2.2@39.266,68.526 v1@41.341,68.526
  Bottom Layer w0.5: v1@35.469,73.719 39.459,69.729 40.227,69.729 41.366,68.59 v1(41.366,68.501)
/FLT_3: AND4_2.3 GD_3.13 RGD2_3.2 T3.5 | length 129.3
  Top Layer w0.35: T3.5@102.023,64.474 v1(103.773,64.474)
  Top Layer w0.4: GD_3.13@132.84,133.815 138.685,133.815 144,128.5 144,72 v1(142.5,70.5)
  Top Layer w0.5: v1@103.898,64.349 RGD2_3.2@106.073,64.349 ; v1(109.723,59.624) AND4_2.3@111.749,59.624
  Bottom Layer w0.5: v1(109.723,59.624) 108.623,59.624 v1(103.773,64.474) 103.773,68.273 106,70.5 v1(142.5,70.5)
/FLT_4: AND4_2.12 GD_4.13 RGD2_4.2 T4.5 | length 88.1
  Top Layer w0.35: v1@125.123,63.974 T4.5@126.773,63.974
  Top Layer w0.4: v4(129.18,57.65) 133.4,57.65 140.154,64.404 140.154,77.154 141,78 141,105.6 137.891,108.709 GD_4.13@132.84,108.709
  Top Layer w0.5: AND4_2.12@117.123,59.594 120.293,59.594 123.023,62.324 RGD2_4.2@123.023,63.999 v1@125.098,63.999
  Bottom Layer w0.5: v1(125.023,63.874) 123.23,62.081 123.23,61.075 126.655,57.65 v4(129.18,57.65)
/RST_1: GD_1.14 GD_2.14 GD_3.14 GD_4.14 PushBotton.3 RB_1.2 | length 371.3
  Top Layer w0.4: v1(13,137.25) 13.785,138.035 GD_1.14@17.05,138.035 ; v1(14.89,113.29) GD_2.14@17.05,113.29 ; GD_4.14@132.84,109.979 v1(135.871,109.979) ; GD_3.14@132.84,135.085 v1(136,135.085)
  Top Layer w0.5: v1(57.7,19.7) 62.5,19.7 RB_1.2@62.5,22.725
  Bottom Layer w0.4: 6.5,113.25 6.54,113.29 v1(14.89,113.29) ; v1(13,137.25) 6.5,130.75 6.5,58 19.425,45.075 55.25,45.075 ; v1(57.7,19.7) 55.25,22.15 55.25,45.075 ; v1@136,110.108 v1(135.871,109.979) 144.5,109.979 ; v1(136,135.085) 144.5,126.585 144.5,65.1 135,55.6 65.775,55.6 55.25,45.075
ADGND_G1: "LEG 1.S1D2" CDC3_1.2 CG2_1.1 CG3_1.1 D1_2.K DC/DC_1.7 DSCH_1.A DZ_1.2 GD_1.1 GD_1.3 GD_1.8 RGS_1.2 V_LOAD_1.1 V_LOAD_1.2 V_LOAD_1.3 V_LOAD_1.4 | length 44.1
  Top Layer w0.4: GD_1.3@26.761,138.035 27.635,138.035 28.6,139 31,139 v1@31.375,138.625 ; GD_1.8@26.761,144.385 v1(28.885,144.385)
  Top Layer w0.5: GD_1.1@26.761,135.495 29.255,135.495 30.483,134.267 DSCH_1.A@31.4,134.267
  Top Layer w0.6: CG2_1.1@29.25,139 31,139 v1@31.375,138.625
  Top Layer w1: v1(28.75,133.5) CG3_1.1@28.75,135.15 ; v1@28.8,150.6 v1(28.84,150.64) ; v1(41.3,145.525) 47.365,145.525 DZ_1.2@47.39,145.55 44.3,145.55 RGS_1.2@44,145.25 ; D1_2.K@44.841,111.838 44.864,111.815 52.379,111.815
  Top Layer w1.5: v1(28.84,150.64) DC/DC_1.7@28.84,161.2
  other v1: 31.25,138.5 12.5,187.5 22.5,187.5 17.5,192.5 12.5,197.5 22.5,197.5 17.5,202.5 12.5,207.5 22.5,207.5 17.5,212.5 12.5,217.5 22.5,217.5 17.5,222.5 12.5,227.5 22.5,227.5 17.5,232.5 12.5,237.5 22.5,237.5 17.5,242.5 12.5,247.5 22.5,247.5 17.5,252.5 12.5,257.5 22.5,257.5 17.5,262.5 12.5,267.5 22.5,267.5 17.5,272.5 12.5,277.5 22.5,277.5 17.5,282.5 12.5,287.5 22.5,287.5 17.5,292.5 12.5,297.5 22.5,297.5